# Altium PCB hand.PcbDoc
Units mm, origin at the board's own origin, x right, y up, seen from the top; angles counter-clockwise.
Board outline 39 x 23 mm, 2 copper layers (Top Layer, Bottom Layer); 23 components, 24 nets, 91 pads, 24 vias.
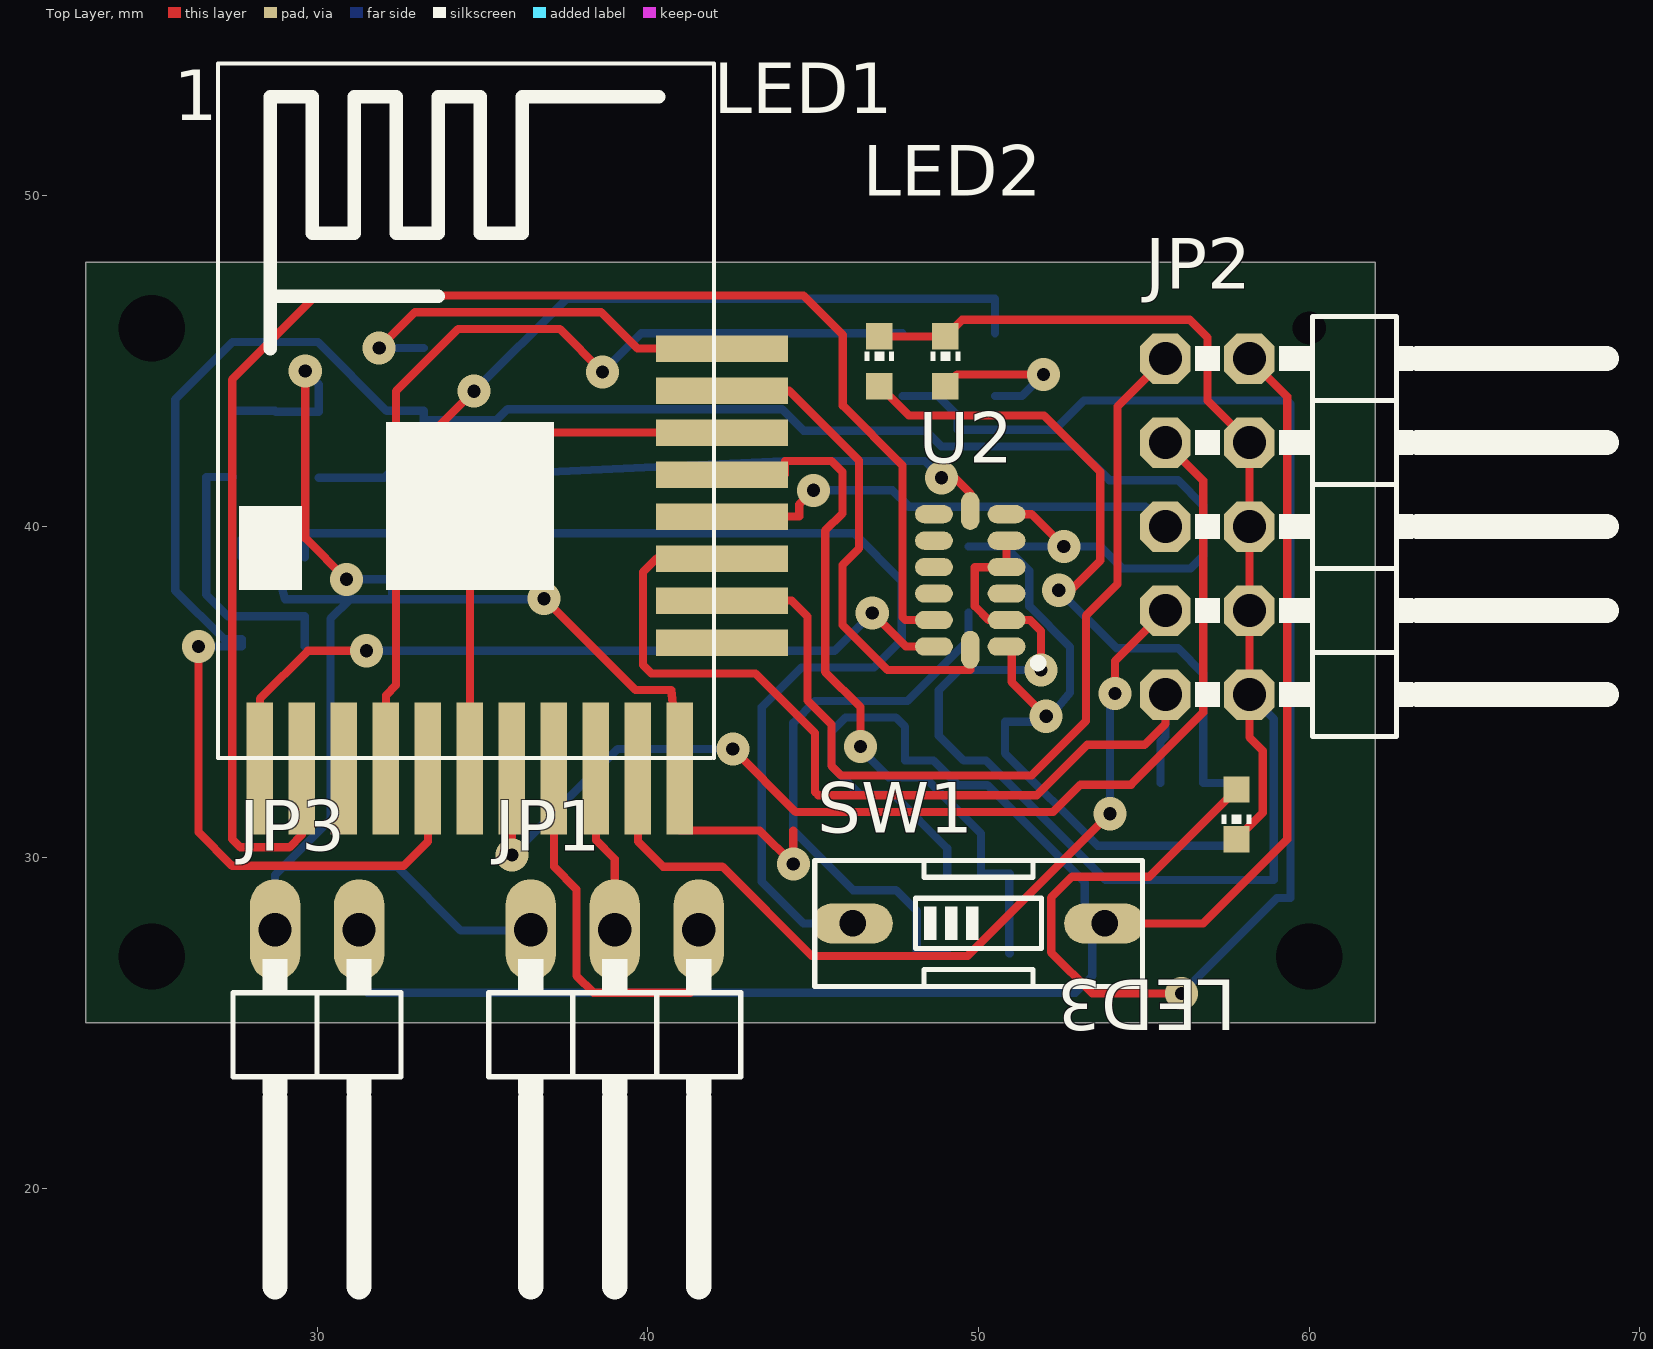
[diagram p0: Top Layer view]
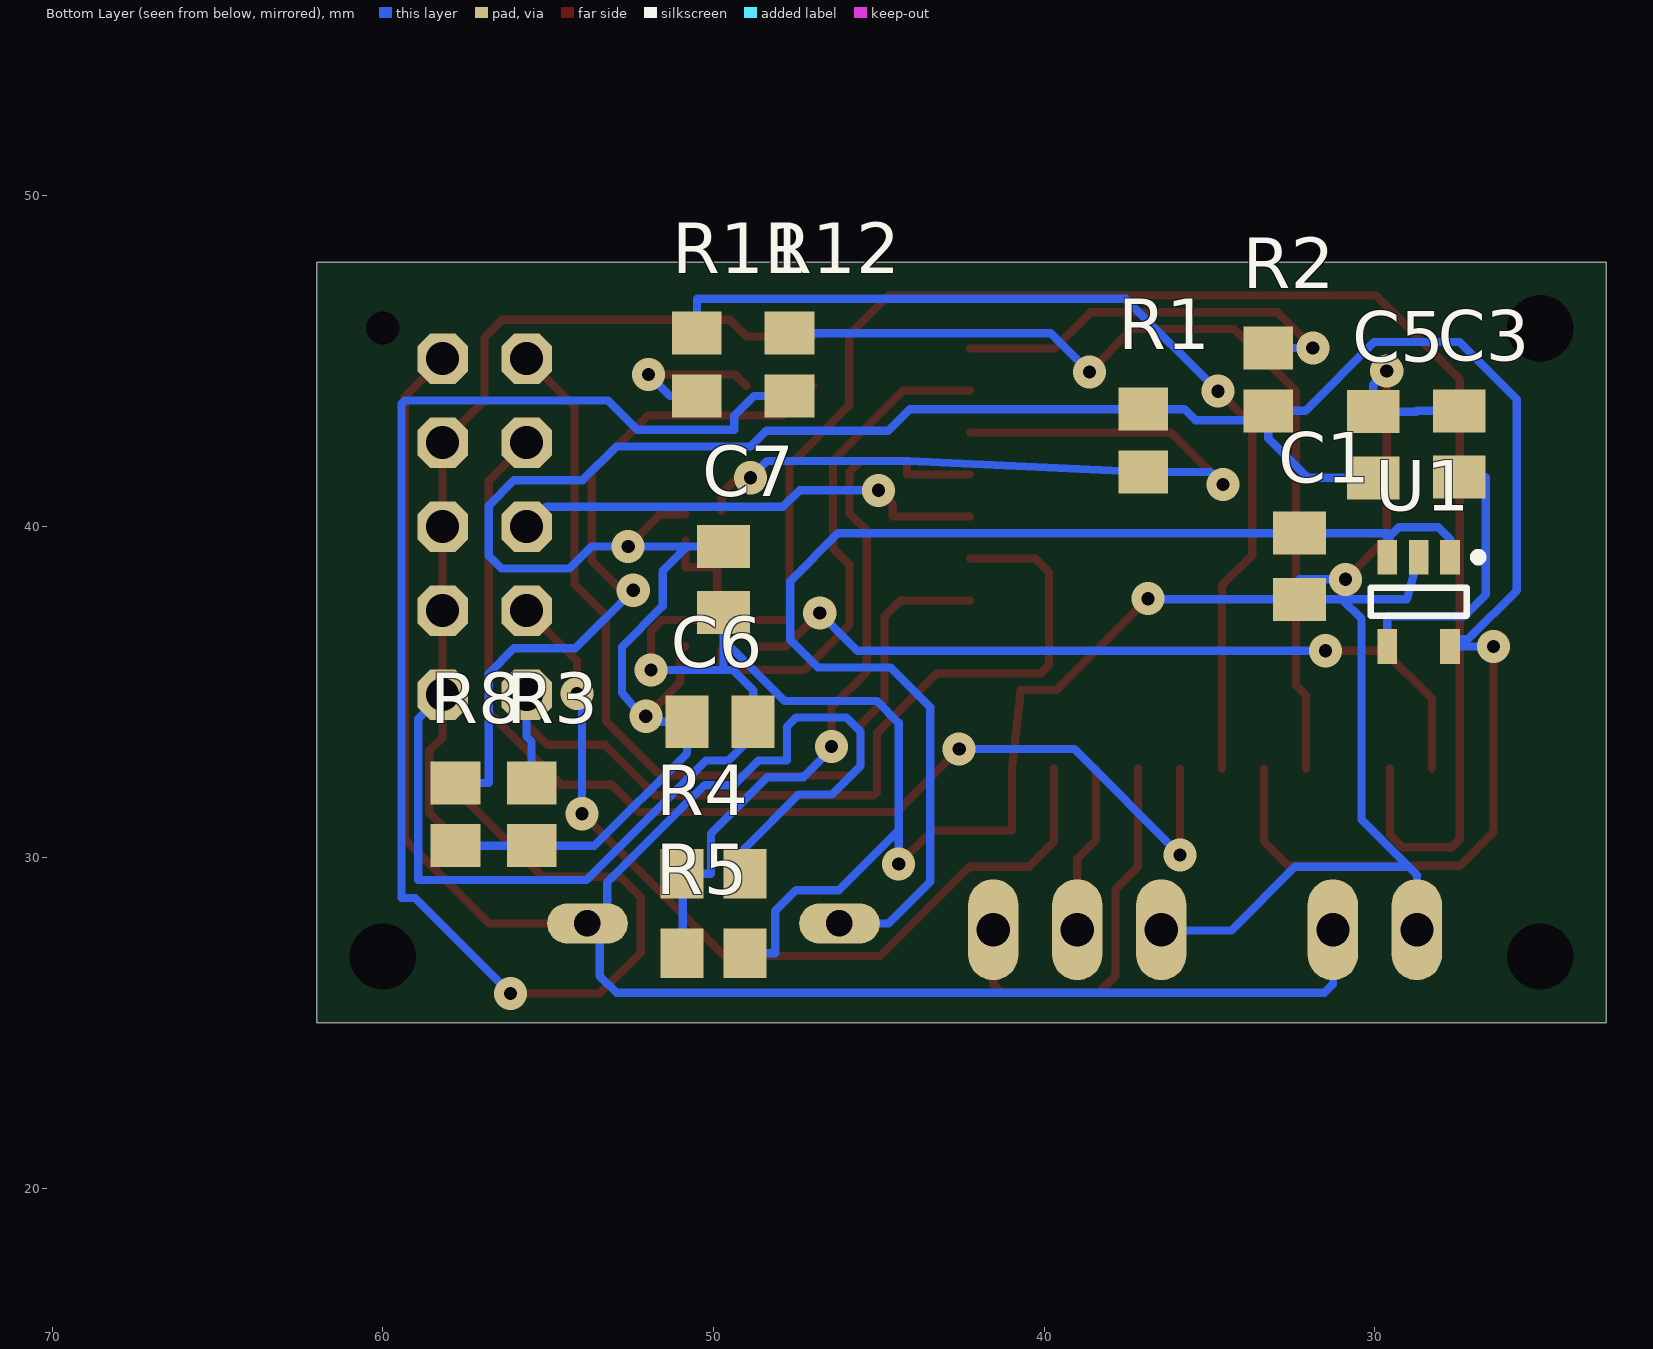
[diagram p1: Bottom Layer view, seen from below]

## Layer stack, top to bottom
Top Solder: solder mask 0.0102, Solder Resist, Dk 3.5
Top Layer: signal copper 0.0356
Dielectric 1: dielectric 0.32, FR-4, Dk 4.8
Bottom Layer: signal copper 0.0356
Bottom Solder: solder mask 0.0102, Solder Resist, Dk 3.5

## Board outline
23,25 23,48 62,48 62,25

## Design rules (kind name [scope] priority, off if disabled: settings)
Clearance [All] p1: gap=0.25
PlaneClearance [All] p1: clearance=0.3
PolygonConnect [All] p1: connectstyle=Relief reliefconductorwidth=0.254 reliefentries=4 polygonreliefangle="90 Angle" airgapwidth=0.254
RoomDefinition ruka [InComponentClass('ruka')] p1: confinementstyle=ConfineIn formatcopy=TRUE lockcomponents=FALSE outline 22.3,13 142.5,13 142.5,92.5 22.3,92.5
RoutingVias [All] p1: holewidth=0.4 width=1 viastyle="Through Hole" minholewidth=0.4 minwidth=1 maxholewidth=0.6 maxwidth=2
SolderMaskExpansion [All] p1: expansion=0.102
Width [All] p1: maxlimit=1 minlimit=0.25 preferedwidth=0.25
29 further rules are at their usual default settings.

## Components (designator, comment, footprint, x,y, rotation, side; value= is the part's Value field where it differs from the comment)
1 "NRF24LE1" SMDNRF 27,33 r0 top
C1 "1uF" C0805K 32.275,38.8 r270 bottom
C3 "10nF" C0805K 27.45,42.5 r90 bottom
C5 "2.2uF" C0805K 30.05,42.475 r90 bottom
C6 "100n" C0805K 49.8,34.1 r180 bottom
C7 "10u" C0805K 49.7,38.4 r270 bottom
JP1 "PIN HEADER" 1X03/90 39,24 r180 top
JP2 "PIN HEADER" 2X05/90 62,40 r270 top
JP3 "PIN HEADER" 1X02/90 30,24 r180 top
LED1 "LED   OSRAM: - CHIPLED LG R971, LG N971, LY N971, LG Q971, LY Q971, LO R971, LY R971 LH N974, LH R974 LS Q976, LO" CHIP-LED0603 47,45 r0 top
LED2 "LED   OSRAM: - CHIPLED LG R971, LG N971, LY N971, LG Q971, LY Q971, LO R971, LY R971 LH N974, LH R974 LS Q976, LO" CHIP-LED0603 49,45 r0 top
LED3 "LED   OSRAM: - CHIPLED LG R971, LG N971, LY N971, LG Q971, LY Q971, LO R971, LY R971 LH N974, LH R974 LS Q976, LO" CHIP-LED0603 57.8,31.3 r180 top
R1 "10k" R0805 37,42.6 r90 bottom
R2 "10k" R0805 33.225,44.45 r90 bottom
R3 "10k" R0805 55.5,31.3 r90 bottom
R4 "" R0805 50,29.5 r180 bottom
R5 "" R0805 50,27.1 r0 bottom
R8 "" R0805 57.8,31.3 r270 bottom
R11 "" R0805 50.5,44.9 r90 bottom
R12 "" R0805 47.7,44.9 r90 bottom
SW1 "DIP SWITCH" EDG-01 50,28 r270 top
U1 "LP2985-33DBVRE4" TI-DBV5_V 28.675,37.725 r270 bottom
U2 "ADXL345TCCZ-EP" ADI-CC-14-1_V 49.75,38.375 r180 top

## Footprints (in the part's own frame and the unit in brackets; to place one, negate y for a bottom-side part, rotate by r counter-clockwise, add the part's x,y. Pads: shape width x height; smd on the part's side, far side on the other; paste and mask are expansions set on the pad)
1X02/90 [mil]
  oval 60x120 hole 39.37: 1(-50,-150) 2(50,-150)
  silkscreen extent -100,-115 100,275
1X03/90 [mil]
  oval 60x120 hole 39.37: 1(-100,-150) 2(0,-150) 3(100,-150)
  silkscreen extent -150,-115 150,275
2X05/90 [mil]
  oct 60x60 hole 39.37: 1(-200,-250) 2(-200,-150) 3(-100,-250) 4(-100,-150) 5(0,-250) 6(0,-150) 7(100,-250) 8(100,-150) 9(200,-250) 10(200,-150)
  silkscreen extent -250,-215 250,275
ADI-CC-14-1_V [mm] "QFN, 14-Leads, Body 5x3mm, Pitch 0.8mm"
  oval 1.145x0.55 smd: 1(-1.097,2) 2(-1.097,1.2) 3(-1.097,0.4) 4(-1.097,-0.4) 5(-1.097,-1.2) 6(-1.097,-2) 8(1.097,-2) 9(1.097,-1.2) 10(1.097,-0.4) 11(1.097,0.4) 12(1.097,1.2) 13(1.097,2)
  oval 0.55x1.145 smd: 7(0,-2.097) 14(0,2.098)
  silkscreen extent -2.18,2.38 -1.93,2.62, body extent -1.5,-2.5 1.5,2.5, height 1
C0805K [mm]
  rect 1.3x1.6 smd: 1(-1,0) 2(1,0)
CHIP-LED0603 [mil]
  rect 31.5x31.5 smd: A(0,-29.53) C(0,29.53)
  silkscreen extent -18,0 18,12
EDG-01 [mil]
  oval 48x96 hole 31.5: 1(0,-150) 2(0,150)
  silkscreen extent -75,-195 75,195
R0805 [mm]
  rect 1.3x1.5 smd: 1(-0.95,0) 2(0.95,0)
SMDNRF [mil]
  rect 31.5x157.48 smd: GND(550,-12.5) P0.0(150,-12.5) P0.1(200,-12.5) P0.2(300,-12.5) P0.3(400,-12.5) P0.4(450,-12.5) P0.5(500,-12.5) P1.5(50,-12.5) P1.6(100,-12.5) PROG(350,-12.5) VCC(250,-12.5)
  rect 157.48x31.5 smd: P0.6(600,137.5) P0.7(600,187.5) P1.0(600,237.5) P1.1(600,287.5) P1.2(600,337.5) P1.3(600,387.5) P1.4(600,437.5) RST(600,487.5)
  silkscreen extent 0,0 591,827
TI-DBV5_V [mm] "SOT23, 5-Leads, Body 2.9x1.6mm, Pitch 0.95mm"
  rect 1.05x0.6 smd paste-0.025 mask+0.07: 1(-1.35,0.95) 2(-1.35,0) 3(-1.35,-0.95) 4(1.35,-0.95) 5(1.35,0.95)
  silkscreen extent -1.47,-1.45 0.42,1.92, body extent -0.8,-1.45 0.8,1.45, height 1.45

## Part data
C1 C3 C5 C6 C7: library part C-EUC0805K
JP1: library part PINHD-1X3/90
JP2: library part PINHD-2X5/90
JP3: library part PINHD-1X2/90
LED1 LED2 LED3: library part LEDCHIP-LED0603
R1 R2 R3 R4 R5 R8 R11 R12: library part R-EU_R0805
SW1: library part SW_DIP-1
U1: library part CMP-0758-00029-1, "Single Output Low Noise LDO, 150 mA, Fixed 3.3 V Output, 1.5% Tolerance, 2.2 to 16 V Input, Low IQ, 5-Pin SOT-23 (DBV), -40 to 125 degC, Green (RoHS & no Sb/Br), Tape and Reel"
U2: library part CMP-0885-00034-1, "3-Axis, +/-2 g / +/-4 g / +/-8 g / +/-16 g Digital Accelerometer with Digital Output, 1.6 KHz BW, Industrial, 14-pin LGA, Tray"

## Free pads (board coordinates)
  round 0 hole 2: 3(25,27) 3(25,46) 3(60,27)
  round 0 hole 1: 3(60,46)

## Via types
v1: diameter 1, hole 0.4, Top Layer to Bottom Layer, 24 vias

## Nets (pads, with @x,y where several pads share a name; then routed paths per layer and width w, separated by ;. In a path a pad name is that pad's centre, name@x,y a point inside that pad or via, vN(x,y) a via of type N, cw(c..) or ccw(c..) an arc to the next point about the centre after c; other vN are vias at no path point)
3.3V: 1.VCC C5.1 C6.1 C7.1 R1.2 R2.1 R3.1 R8.2 U1.5 U2.1 U2.6 | length 94.7
  Top Layer w0.25: v1(26.416,36.375) 26.416,30.759 27.432,29.743 32.613,29.743 33.35,30.48 1.VCC ; U2.1 51.003,36.375 51.003,35.306 v1(52.045,34.265) ; U2.6 51.603,40.375 v1(52.578,39.4)
  Bottom Layer w0.25: v1(26.416,36.375) U1.5 27.725,36.601 27.178,36.601 25.71,38.07 25.71,43.845 27.443,45.579 30.027,45.579 32.106,43.5 R2.1 R2.1@33.225,43.219 ; C5.1 32.028,41.475 33.225,42.672 R2.1@33.225,43.219 ; C7.1 50.8,39.4 ; v1(52.045,34.265) v1@52.045,34.1 ; R8.2 R3.1 53.596,30.35 50.8,33.146 C6.1 v1@52.045,34.1 ; R2.1@33.225,43.219 35.432,43.219 35.762,43.55 R1.2 44.055,43.55 44.704,42.901 48.399,42.901 48.875,42.425 52.931,42.425 53.953,41.403 56.031,41.403 56.794,40.64 56.794,39.116 56.413,38.735 54.356,38.735 53.691,39.4 v1(52.578,39.4) 50.8,39.4 ; 50.8,39.4 51.537,38.663 51.537,37.592 52.767,36.361 52.767,34.987 52.125,34.199 v1@52.045,34.1
C\S\: 1.P1.3 R1.1 U2.7 | length 24.6
  Top Layer w0.25: v1(34.595,41.275) 36.162,42.842 1.P1.3 ; v1(48.883,41.478) 49.276,41.478 49.75,41.004 U2.7
  Bottom Layer w0.25: v1(34.595,41.275) 34.97,41.65 R1.1 44.1,41.986 48.375,41.986 v1(48.883,41.478)
FCSN: 1.P1.1 JP2.5 | length 14.4
  Top Layer w0.25: 1.P1.1 44.577,40.302 44.577,40.665 v1(45.009,41.097)
  Bottom Layer w0.25: v1(45.009,41.097) 47.399,41.097 47.893,40.603 55.047,40.603 JP2.5
FMISO: 1.P1.0 JP2.9 R3.2 | length 28.4
  Top Layer w0.25: 1.P1.0 40.259,39.032 39.853,38.626 39.853,35.814 40.107,35.56 43.256,35.56 45.056,33.76 45.056,31.975 45.154,31.877 51.763,31.877 53.287,33.401 55.015,33.401 55.65,34.036 JP2.9
  Bottom Layer w0.25: R3.2 55.5,33.503 55.65,33.653 JP2.9
FMOSI: 1.P0.7 JP2.1 | length 28.1
  Top Layer w0.25: 1.P0.7 44.35,37.762 44.831,37.281 44.831,34.741 45.556,34.016 45.556,32.766 45.847,32.475 51.607,32.475 53.252,34.121 53.252,37.307 54.204,38.258 54.204,43.634 JP2.1
FSCK: 1.P0.5 JP2.7 | length 26.5
  Top Layer w0.25: 1.P0.5 39.7,30.48 40.462,29.718 42.254,29.718 44.957,27.015 49.672,27.015 v1(53.975,31.318) ; v1(54.127,34.95) 54.127,35.937 JP2.7
  Bottom Layer w0.25: v1(53.975,31.318) 53.975,34.798 v1(54.127,34.95)
GINT1: 1.P0.6
GND: 1.GND C1.2 C3.2 C5.2 C6.2 C7.2 JP1.3 JP2.4 JP2.6 JP2.8 JP2.10 JP3.2 LED1.C LED2.C LED3.C R5.1 U1.2 U2.2 U2.4 U2.5 | length 130.2
  Top Layer w0.25: v1(29.642,44.704) 29.642,39.649 v1(30.886,38.405) ; v1(36.861,37.821) 39.624,35.057 40.711,35.057 1.GND 40.97,30.81 43.383,30.81 v1(44.399,29.794) 44.399,30.81 ; LED1.C LED2.C 49.503,46.253 56.388,46.253 56.921,45.72 56.921,43.809 JP2.4 JP2.6 JP2.8 JP2.10 58.19,33.63 58.598,33.222 58.598,31.348 LED3.C ; U2.5 U2.4 49.886,38.775 49.886,37.592 50.303,37.175 U2.2 51.562,37.175 51.892,36.845 v1(51.892,35.662)
  Bottom Layer w0.25: C3.2 28.727,43.5 28.752,43.475 C5.2 30.05,44.296 v1(29.642,44.704) ; U1.2 29.026,37.8 30.988,37.8 ; JP3.2 28.73,29.464 28.984,29.718 ; v1(30.886,38.405) 32.275,38.405 C1.2 ; JP1.3 36.46,27.788 34.341,27.788 32.41,29.718 28.984,29.718 ; v1(36.861,37.821) 36.84,37.8 C1.2 ; v1(44.399,29.794) 44.399,30.81 ; R5.1 48.135,27.1 48.135,28.37 47.498,29.007 46.203,29.007 44.399,30.81 ; C7.2 49.7,36.576 ; v1(51.892,35.662) 49.7,35.662 ; JP2.10 58.928,34.182 58.928,29.312 53.841,29.312 50.228,32.925 49.551,32.925 48.8,33.676 C6.2 48.8,35.052 49.41,35.662 49.7,35.662 ; 28.984,29.718 30.404,31.138 30.404,37.216 30.988,37.8 ; 30.988,37.8 C1.2 ; 44.399,30.81 44.399,34.068 45.056,34.725 47.849,34.725 49.7,36.576 ; 49.7,35.662 49.7,36.576
MISO: 1.P1.6 U2.12 | length 48.5
  Top Layer w0.25: 1.P1.6 29.54,30.683 29.159,30.302 27.686,30.302 27.432,30.556 27.432,44.444 29.973,46.985 44.709,46.985 45.898,45.796 45.898,43.658 47.701,41.854 47.701,37.262 47.788,37.175 U2.12
MOSI: 1.P1.5 U2.13 | length 24
  Top Layer w0.25: 1.P1.5 28.27,34.798 29.718,36.246 v1(31.496,36.246) ; v1(46.787,37.389) 47.801,36.375 U2.13
  Bottom Layer w0.25: v1(31.496,36.246) 45.644,36.246 v1(46.787,37.389)
Net1_RST: 1.RST R2.2 | length 12.6
  Top Layer w0.25: v1(31.877,45.4) 32.962,46.485 38.588,46.485 39.691,45.382 1.RST
  Bottom Layer w0.25: v1(31.877,45.4) R2.2
NetC1_1: C1.1 SW1.1 U1.1 U1.3 | length 38.1
  Bottom Layer w0.25: U1.1 27.725,39.624 28.081,39.98 29.286,39.98 29.545,39.72 ; SW1.1 44.704,28 43.445,29.259 43.445,34.544 44.643,35.741 46.841,35.741 47.676,36.576 47.676,38.352 46.228,39.8 C1.1 29.625,39.8 29.545,39.72 ; 29.545,39.72 29.625,39.641 U1.3 29.545,39.72
NetC3_1: C3.1 U1.4 | length 8.5
  Bottom Layer w0.25: C3.1 26.645,41.5 26.645,37.948 27.305,37.287 29.625,37.287 U1.4
NetLED1_A: LED1.A R8.1 | length 21.8
  Top Layer w0.25: LED1.A 47.892,43.358 51.981,43.358 53.683,41.656 53.683,38.975 52.783,38.075 v1(52.426,38.075)
  Bottom Layer w0.25: v1(52.426,38.075) 54.178,36.322 56.032,36.322 56.794,35.56 56.794,32.25 R8.1
NetLED2_A: LED2.A R11.1 | length 4.9
  Top Layer w0.25: LED2.A 49.352,44.602 v1(51.968,44.602)
  Bottom Layer w0.25: R11.1 51.316,43.95 v1(51.968,44.602)
NetLED3_A: LED3.A R12.1 | length 45.3
  Top Layer w0.25: v1(56.134,25.883) 53.442,25.883 52.197,27.127 52.197,28.778 52.832,29.413 55.163,29.413 LED3.A
  Bottom Layer w0.25: R12.1 48.768,43.95 49.375,43.343 49.375,42.925 52.298,42.925 53.188,43.815 59.334,43.815 59.436,43.713 59.436,28.768 59.019,28.768 v1(56.134,25.883)
P0.1: 1.P0.1 R12.2 | length 28.7
  Top Layer w0.25: 1.P0.1 32.08,34.899 32.385,35.204 32.385,44.094 34.265,45.974 37.338,45.974 v1(38.633,44.679)
  Bottom Layer w0.25: v1(38.633,44.679) 39.805,45.85 R12.2
P0.2: 1.P0.2 R11.2 | length 30.2
  Top Layer w0.25: 1.P0.2 34.62,38.227 33.706,39.141 33.706,43.053 v1(34.747,44.094)
  Bottom Layer w0.25: v1(34.747,44.094) 37.541,46.888 50.5,46.888 R11.2
PROG: 1.PROG JP2.3 | length 35.5
  Top Layer w0.25: v1(35.89,30.074) 1.PROG ; v1(42.57,33.274) 44.472,31.372 52.258,31.372 53.082,32.196 54.615,32.196 56.794,34.376 56.794,41.396 JP2.3
  Bottom Layer w0.25: v1(35.89,30.074) 39.09,33.274 v1(42.57,33.274)
RXD: 1.P0.4 JP1.2 | length 5.1
  Top Layer w0.25: 1.P0.4 38.43,30.517 39,29.947 JP1.2
SCK: 1.P1.4 U2.14 | length 15.2
  Top Layer w0.25: 1.P1.4 44.272,44.112 46.384,42.001 46.384,39.335 45.887,38.838 45.887,37.024 47.249,35.662 49.75,35.662 U2.14
SENSE: 1.P1.2 R4.1 R5.2 | length 22.5
  Top Layer w0.25: 1.P1.2 44.145,41.572 44.145,41.986 45.554,41.986 45.884,41.656 45.884,40.397 45.364,39.878 45.364,35.611 46.431,34.544 v1(46.431,33.35)
  Bottom Layer w0.25: v1(46.431,33.35) 46.431,33.269 47.275,32.425 48.372,32.425 50.076,30.721 50.076,29.5 R4.1@50.927,29.5 ; R5.2 50.927,27.1 R4.1@50.927,29.5 ; R4.1 R4.1@50.927,29.5
TXD: 1.P0.3 JP1.1 | length 12.2
  Top Layer w0.25: 1.P0.3 37.16,29.718 37.846,29.032 37.846,26.416 38.354,25.908 41.286,25.908 41.54,26.162 JP1.1
VBAT: JP2.2 JP3.1 R4.2 SW1.2 | length 66
  Top Layer w0.25: SW1.2 56.794,28 59.334,30.54 59.334,43.936 JP2.2
  Bottom Layer w0.25: JP3.1 31.27,26.162 31.524,25.908 52.934,25.908 53.442,26.416 SW1.2@53.442,28 ; R4.2 49.05,30.274 47.422,31.902 46.42,31.902 45.556,32.766 45.556,33.807 45.974,34.225 47.498,34.225 47.775,33.948 47.775,32.925 48.638,32.925 49.381,32.182 50.264,32.182 53.213,29.233 53.213,28 SW1.2@53.442,28 ; SW1.2 SW1.2@53.442,28
pads on no net: 1.P0.0 U2.3 U2.8 U2.9 U2.10 U2.11

## Text inside footprints (layer, text, board x,y; h text height)
SW1: Mechanical 16 "ON" at 52.54,29.27 h2.36 r270; Mechanical 16 "1" at 45.809,28.254 h2.36 r270